# Altium PCB 测频.PcbDoc
Units mil, origin at the board's own origin, x right, y up, seen from the top; angles counter-clockwise.
Board outline 2425.03 x 818.03 mil, 2 copper layers (Top Layer, Bottom Layer); 31 components, 15 nets, 99 pads, 52 vias.
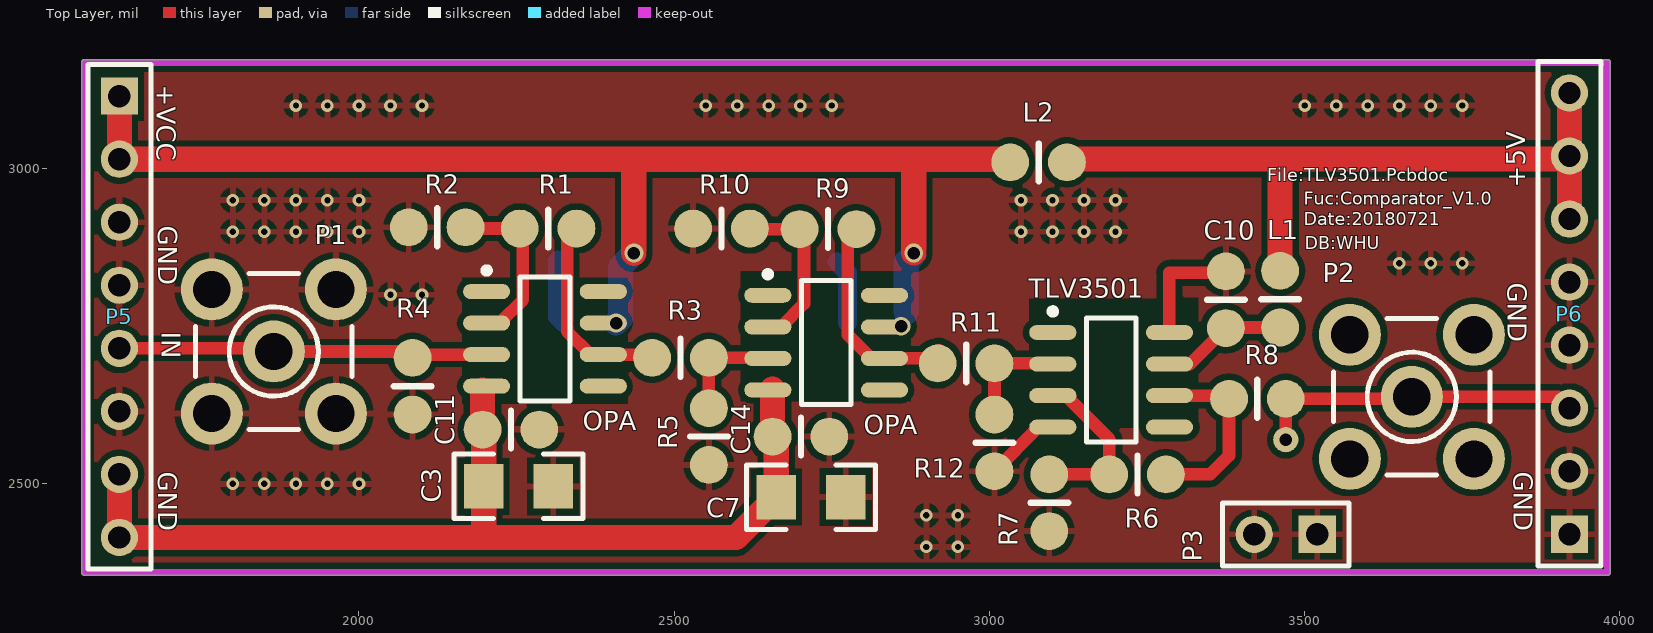
[diagram p0: Top Layer view]
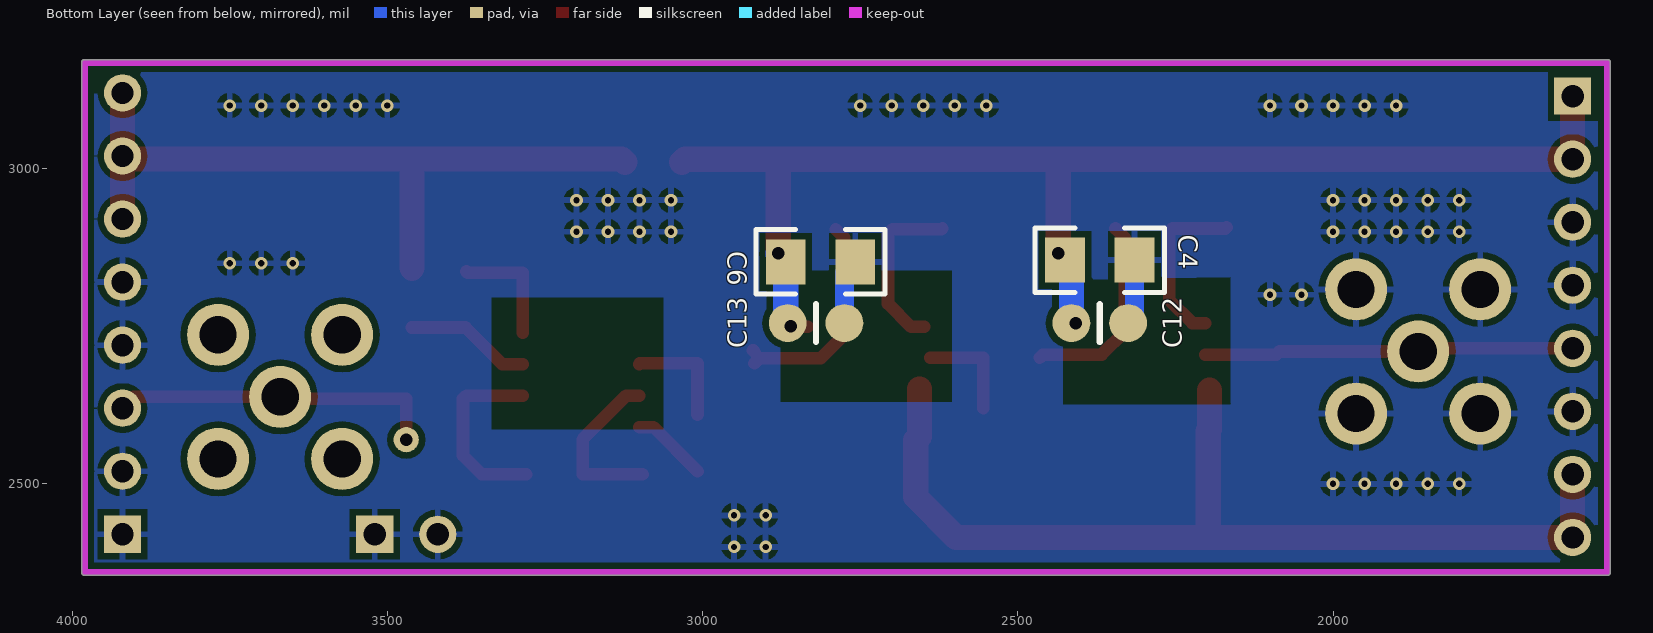
[diagram p1: Bottom Layer view, seen from below]

## Layer stack, top to bottom
Top Solder: solder mask 0.4, Solder Resist, Dk 3.5
Top Layer: signal copper 1.4
Dielectric 1: dielectric 12.6, FR-4, Dk 4.8
Bottom Layer: signal copper 1.4
Bottom Solder: solder mask 0.4, Solder Resist, Dk 3.5

## Board outline
1565,2354.99 cw(c1565,2360) 1559.98,2360 1559.98,3168 cw(c1565,3168) 1565,3173.01 3980,3173.01 cw(c3980,3168) 3985.01,3168 3985.01,2360 cw(c3980,2360) 3980,2354.99

## Design rules (kind name [scope] priority, off if disabled: settings)
Clearance [All] p1: gap=5 ignorepadtopadclearanceinfootprint=FALSE except(0: Arc-Hole Track-Hole SMDPad-Hole THPad-Hole Via-Hole Fill-Hole Poly-Hole Region-Hole Text-Hole)
PolygonConnect [All] p1: connectstyle=Relief reliefconductorwidth=10 reliefentries=4 polygonreliefangle="90 Angle" airgapwidth=10
RoutingVias [All] p1: holewidth=20 width=30 viastyle="Through Hole" minholewidth=15 minwidth=20 maxholewidth=28 maxwidth=50
SolderMaskExpansion [All] p1: expansion=4
Width [All] p1: maxlimit=60 minlimit=10 preferedwidth=30
30 further rules are at their usual default settings.

## Components (designator, comment, footprint, x,y, rotation, side; value= is the part's Value field where it differs from the comment)
C3 "Cap Pol1" CAPC3216[1206]S 2253,2496 r180 top
C4 "Cap Pol1" CAPC3216[1206]S 2370,2855 r180 bottom
C6 "Cap Pol1" CAPC3216[1206]S 2813,2852 r180 bottom
C7 "Cap Pol1" CAPC3216[1206]S 2717,2479 r180 top
C10 "Cap" A-0805 3375,2792 r180 top
C11 "Cap" A-0805 2241,2586 r90 top
C12 "Cap" A-0805 2370,2755 r90 bottom
C13 "Cap" A-0805 2820,2755 r90 bottom
C14 "Cap" A-0805 2701,2575 r90 top
L1 "Inductor" A-0805 3461,2793 r180 top
L2 "Inductor" A-0805 3078,3010 r270 top
OPA "OPA699" D008_L 2295,2730 r0 top
OPA "OPA699" D008_L 2741,2724 r0 top
P1 "SMB" SMB_V-RJ45 1865,2710 r0 top
P2 "SMB" SMB_V-RJ45 3670,2638 r0 top
P3 "Header 2" HDR1X2 3520,2420 r180 top
P5 "Header 8" HDR1X8 1620,3115 r270 top
P6 "Header 8" HDR1X8 3920,2420 r90 top
R1 "Res2" A-0805 2300,2905 r270 top
R2 "Res2" A-0805 2124,2907 r270 top
R3 "Res2" A-0805 2510,2700 r270 top
R4 "Res2" A-0805 2085,2655 r0 top
R5 "Res2" A-0805 2555,2575 r0 top
R6 "Res2" A-0805 3235,2515 r90 top
R7 "Res2" A-0805 3095,2470 r0 top
R8 "Res2" A-0805 3425,2635 r270 top
R9 "Res2" A-0805 2744,2904 r90 top
R10 "Res2" A-0805 2575,2905 r90 top
R11 "Res2" A-0805 2963,2691 r270 top
R12 "Res2" A-0805 3008,2565 r180 top
TLV3501 "TLV3501" D008_L 3193,2665 r0 top

## Footprints (in the part's own frame and the unit in brackets; to place one, negate y for a bottom-side part, rotate by r counter-clockwise, add the part's x,y. Pads: shape width x height; smd on the part's side, far side on the other; paste and mask are expansions set on the pad)
A-0805 [mil]
  round 60 smd: 1(0,-45) 2(0,45)
  silkscreen extent -30,0 30,0
CAPC3216[1206]S [mm] "Chip Capacitor, Silkscreen Border,2-Leads, Body 3.20x1.60mm, IPC Medium Density"
  rect 1.6x1.8 smd: 1(-1.4,0) 2(1.4,0)
  silkscreen extent -2.6,-1.3 2.6,1.3, body extent -1.7,-0.9 1.7,0.9, height 1.35
D008_L [mm] "8-Pin Small Outline Integrated Circuit 1.27 mm Pitch, IPC High Density"
  oval 1.9x0.6 smd: 1(-2.35,1.905) 2(-2.35,0.635) 3(-2.35,-0.635) 4(-2.35,-1.905) 5(2.35,-1.905) 6(2.35,-0.635) 7(2.35,0.635) 8(2.35,1.905)
  silkscreen extent -2.47,-2.5 1,2.88, body extent -1.95,-2.45 1.95,2.45, height 1.75
HDR1X2 [mm] "Connector; Header; 2 Position"
  rect 1.5x1.5 hole 0.9: 1(0,0)
  round 1.5 hole 0.9: 2(2.54,0)
  silkscreen extent -1.27,-1.27 3.81,1.27
HDR1X8 [mm] "Connector; Header; 8 Position"
  rect 1.5x1.5 hole 0.9: 1(0,0)
  round 1.5 hole 0.9: 2(2.54,0) 3(5.08,0) 4(7.62,0) 5(10.16,0) 6(12.7,0) 7(15.24,0) 8(17.78,0)
  silkscreen extent -1.27,-1.27 19.05,1.27
SMB_V-RJ45 [mm] "Connector; SMB Straight"
  round 2.5 hole 1.5: 1(0,0) 2(-2.5,-2.5) 2(-2.5,2.5) 2(2.5,-2.5) 2(2.5,2.5)
  silkscreen extent -3.15,-3.15 3.15,3.15

## Part data
C3 C4 C6 C7: "Polarized Capacitor (Radial)"
C10 C11 C12 C13 C14: "Capacitor"
OPA OPA: library part OPA690
P1 P2: "SMB Straight Connector"
P3: "Header, 2-Pin"
P5 P6: "Header, 8-Pin"
R1 R2 R3 R4 R5 R6 R7 R8 R9 R10 R11 R12: "Resistor"

## Free pads (board coordinates)
  round 40 hole 20: 18(3470,2570)

## Via types
v1: diameter 20, hole 10, Top Layer to Bottom Layer, 48 vias
v2: diameter 30, hole 20, Top Layer to Bottom Layer, 4 vias

## Nets (pads, with @x,y where several pads share a name; then routed paths per layer and width w, separated by ;. In a path a pad name is that pad's centre, name@x,y a point inside that pad or via, vN(x,y) a via of type N, cw(c..) or ccw(c..) an arc to the next point about the centre after c; other vN are vias at no path point)
+5V: L1.1 L2.2 P6.6 P6.7 P6.8 | length 1174.6
  Top Layer w40: L2.2 3128.47,3015.47 3461,3015.47 ; L1.1@3461,2842 3461,3015.47 ; P6.6 P6.7 ; P6.8 P6.7 ; 3461,3015.47 3915.47,3015.47 P6.7
+VCC: C4.1 C6.1 C12.2 C13.2 L2.1 OPA.7 P5.1 P5.2 | length 2045.6
  Top Layer w20: OPA.7@2833.52,2749 2859,2749 v2(2860,2750)
  Top Layer w40: P5.1 P5.2 2436,3015 ; v2(2436,2865.88) 2436,3015 ; v2(2880,2866) 2880,2999.24 ; L2.1 3028,3015 2872,3015 2436,3015
  Bottom Layer w40: v2(2408,2755) 2415,2762 2415,2844.88 C4.1 v2(2436,2865.88) ; C13.2@2868.12,2772.12 C6.1 2880,2863.88 v2(2880,2866)
-VCC: C3.2 C7.2 C11.2 C14.2 OPA.4 P5.7 P5.8 | length 1577.8
  Top Layer w40: P5.7 P5.8 2195,2415 ; OPA.4@2196,2648.52 C11.2 2197.88,2584.12 C3.2 2197.88,2417.88 2195,2415 ; OPA.4@2656,2650.48 C14.2 2661.88,2569.12 C7.2 2597.88,2415 2195,2415
GND: C3.1 C4.2 C6.2 C7.1 C10.1 C11.1 C12.1 C13.1 C14.1 P1.2 P3.1 P3.2 P5.3 P5.4 P5.6 P6.1 P6.2 P6.4 P6.5 R2.1 R4.1 R5.1 R7.1 R10.2 R12.2 TLV3501.4 TLV3501.8 | length 515.8
  Top Layer w20: R12.2 3078,2590 TLV3501.4 ; TLV3501.8 3285.52,2834.48 3285,2835 3373,2835 C10.1
  Bottom Layer w30: C4.2 2314.88,2765.12 C12.1 ; C6.2 2775,2834.88 C13.1
  other v1: 2900,2400 2950,2400 2900,2450 2950,2450 1800,2500 1850,2500 1900,2500 1950,2500 2000,2500 2050,2800 2100,2800 3650,2850 3700,2850 3750,2850 1800,2900 1850,2900 1900,2900 1950,2900 2000,2900 3050,2900 3100,2900 3150,2900 3200,2900 1800,2950 1850,2950 1900,2950 1950,2950 2000,2950 3050,2950 3100,2950 3150,2950 3200,2950 1900,3100 1950,3100 2000,3100 2050,3100 2100,3100 2550,3100 2600,3100 2650,3100 2700,3100 2750,3100 3500,3100 3550,3100 3600,3100 3650,3100 3700,3100 3750,3100
IN: OPA.3@2202.48,2705 P1.1 P5.5 R4.2 | length 586.6
  Top Layer w20: P5.5 1860,2715 P1.1 2085,2710 2090,2705 OPA.3@2202.48,2705
NetOPA_2: OPA.2@2202.48,2755 R1.1 R2.2 | length 274.7
  Top Layer w20: R2.2 2171,2905 R1.1 2259.88,2900.12 2259.88,2791.82 2223.06,2755 OPA.2@2202.48,2755
NetOPA_2: OPA.2@2648.48,2749 R9.2 R10.1 | length 273.1
  Top Layer w20: R10.1 2621,2904 R9.2 2705.88,2897.12 2705.88,2785.82 2669.06,2749 OPA.2@2648.48,2749
NetOPA_3: OPA.3@2648.48,2699 R3.2 R5.2 | length 163.5
  Top Layer w20: R5.2 R3.2 OPA.3@2638.48,2700
NetOPA_6: OPA.6@2387.52,2705 R1.2 R3.1 | length 321.5
  Top Layer w20: R1.2 2330.12,2890.12 2330.12,2741.82 2366.94,2705 2387.52,2705 2460,2705 R3.1
NetOPA_6: OPA.6@2833.52,2699 R9.1 R11.1 | length 339
  Top Layer w20: R9.1 2775.12,2890.12 2775.12,2736.82 2812.94,2699 2833.52,2699 2910,2699 R11.1 ; R11.1@2917,2709 R11.1@2920,2712
NetR6_1: R6.1 R8.1 TLV3501.6 | length 299
  Top Layer w20: R6.1 3350,2515 3380,2545 R8.1 3375,2640 TLV3501.6
NetR6_2: R6.2 R7.2 TLV3501.3 | length 269.1
  Top Layer w20: R7.2 R6.2 3190,2571.06 3121.06,2640 TLV3501.3
NetR11_2: R11.2 R12.1 TLV3501.2 | length 173.9
  Top Layer w20: R12.1 R11.2 3099.48,2691 TLV3501.2
OUT: P2.1 P6.3 pad.18 R8.2 | length 523.7
  Top Layer w20: pad.18 R8.2 3667,2635 P2.1 3902,2638 P6.3
POEWR: C10.2 L1.2 TLV3501.7 | length 199.5
  Top Layer w20: TLV3501.7 3318,2690 C10.2 3376,2748 L1.2
pads on no net: OPA.1 OPA.5 OPA.8 P2.2 TLV3501.1 TLV3501.5

## Polygon pours and split planes (outlines as drawn)
GND on Top Layer "GND" (solid, remove dead copper, pour order 8): 1565,2354.57 1565,3173.43 3956.57,3173.43 3980,3150 3980,2360
GND on Bottom Layer "GND" (solid, remove dead copper, pour order 10): 1559.98,2360 1559.98,3162.98 1565,3168 3980,3168 3980,2360

## Keep-outs
Keep-Out Layer:
  lines w10: 1565,2360 1565,3168 3980,3168 3980,2360 1565,2360

## Other copper
Top Layer:
  pour cut-out: 3063,2794 3063,2589 3333,2589 3331,2591 3331,2795
  pour cut-out: 2605,2838 2605,2630 2876,2630 2876,2838
  pour cut-out: 2163,2828 2163,2626 2428,2626 2427,2627 2427,2828
Bottom Layer:
  pour cut-out: 3062,2795 3062,2587 3334,2587 3334,2795
  pour cut-out: 2605,2838 2605,2630 2876,2630 2876,2838
  pour cut-out: 2163,2828 2163,2628 2162,2627 2163,2626 2428,2626 2428,2820 2431,2823

## Silkscreen, mask and mechanical layers (free items; w line width, h text height)
Top Overlay:
  text "+VCC" at 1679,3133 h30 r270
  text "File:TLV3501.Pcbdoc" at 3441,2980 h20
  text "+5V" at 3850,2970 h30 r90
  text "Fuc:Comparator_V1.0" at 3498.53,2942.97 h20
  text "Date:20180721" at 3498.53,2910 h20
  text "GND" at 1682,2909 h30 r270
  text "DB:WHU" at 3500,2871.94 h20
  text "GND" at 3822,2819 h30 r270
  text "IN" at 1687,2741 h30 r270
  text "GND" at 1682,2519 h30 r270
  text "GND" at 3832,2519 h30 r270